# Altium PCB STM32WB_module.PcbDoc
Units mm, origin at the board's own origin, x right, y up, seen from the top; angles counter-clockwise.
Board outline 36.3 x 28.14 mm, 4 copper layers (Top Layer, Mid Layer 1, Mid Layer 2, Bottom Layer), stack 1.57 mm thick; 27 components, 26 nets, 185 pads, 235 vias.
Unrouted connection lines stored in the file: 1.
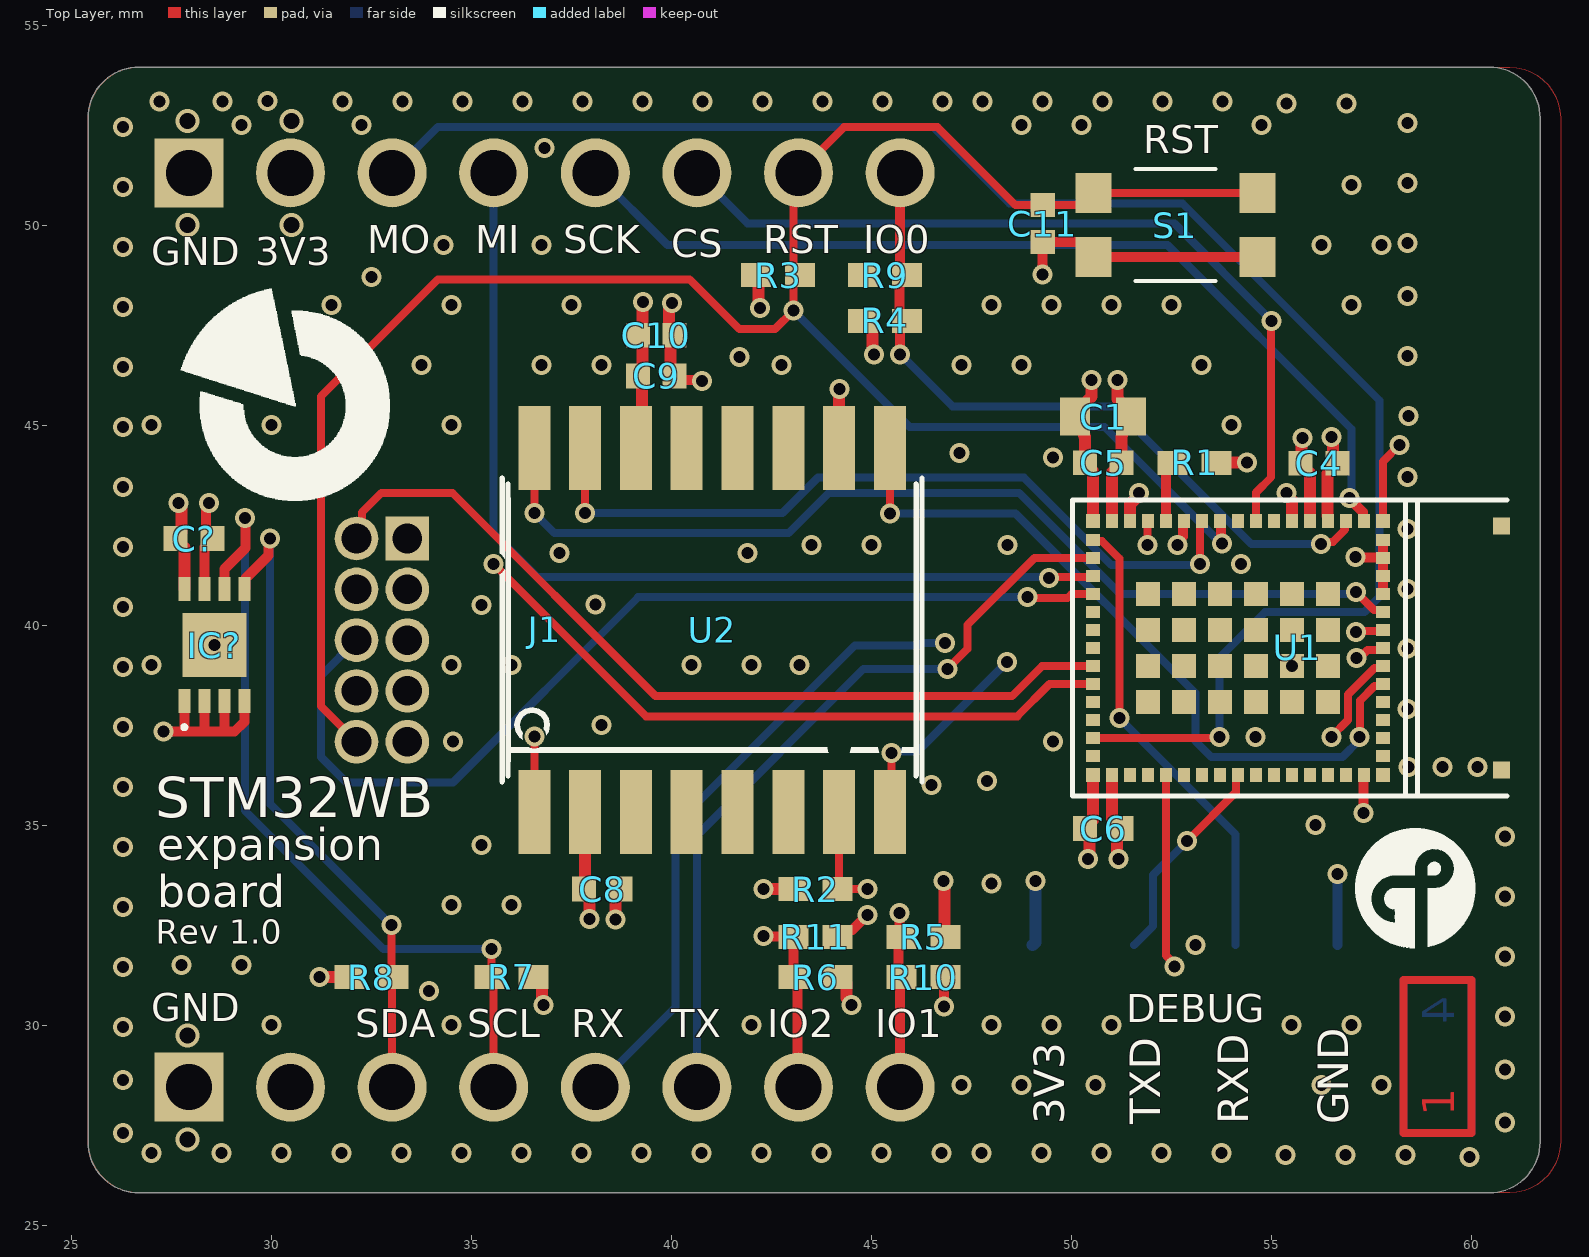
[diagram p0: Top Layer view]
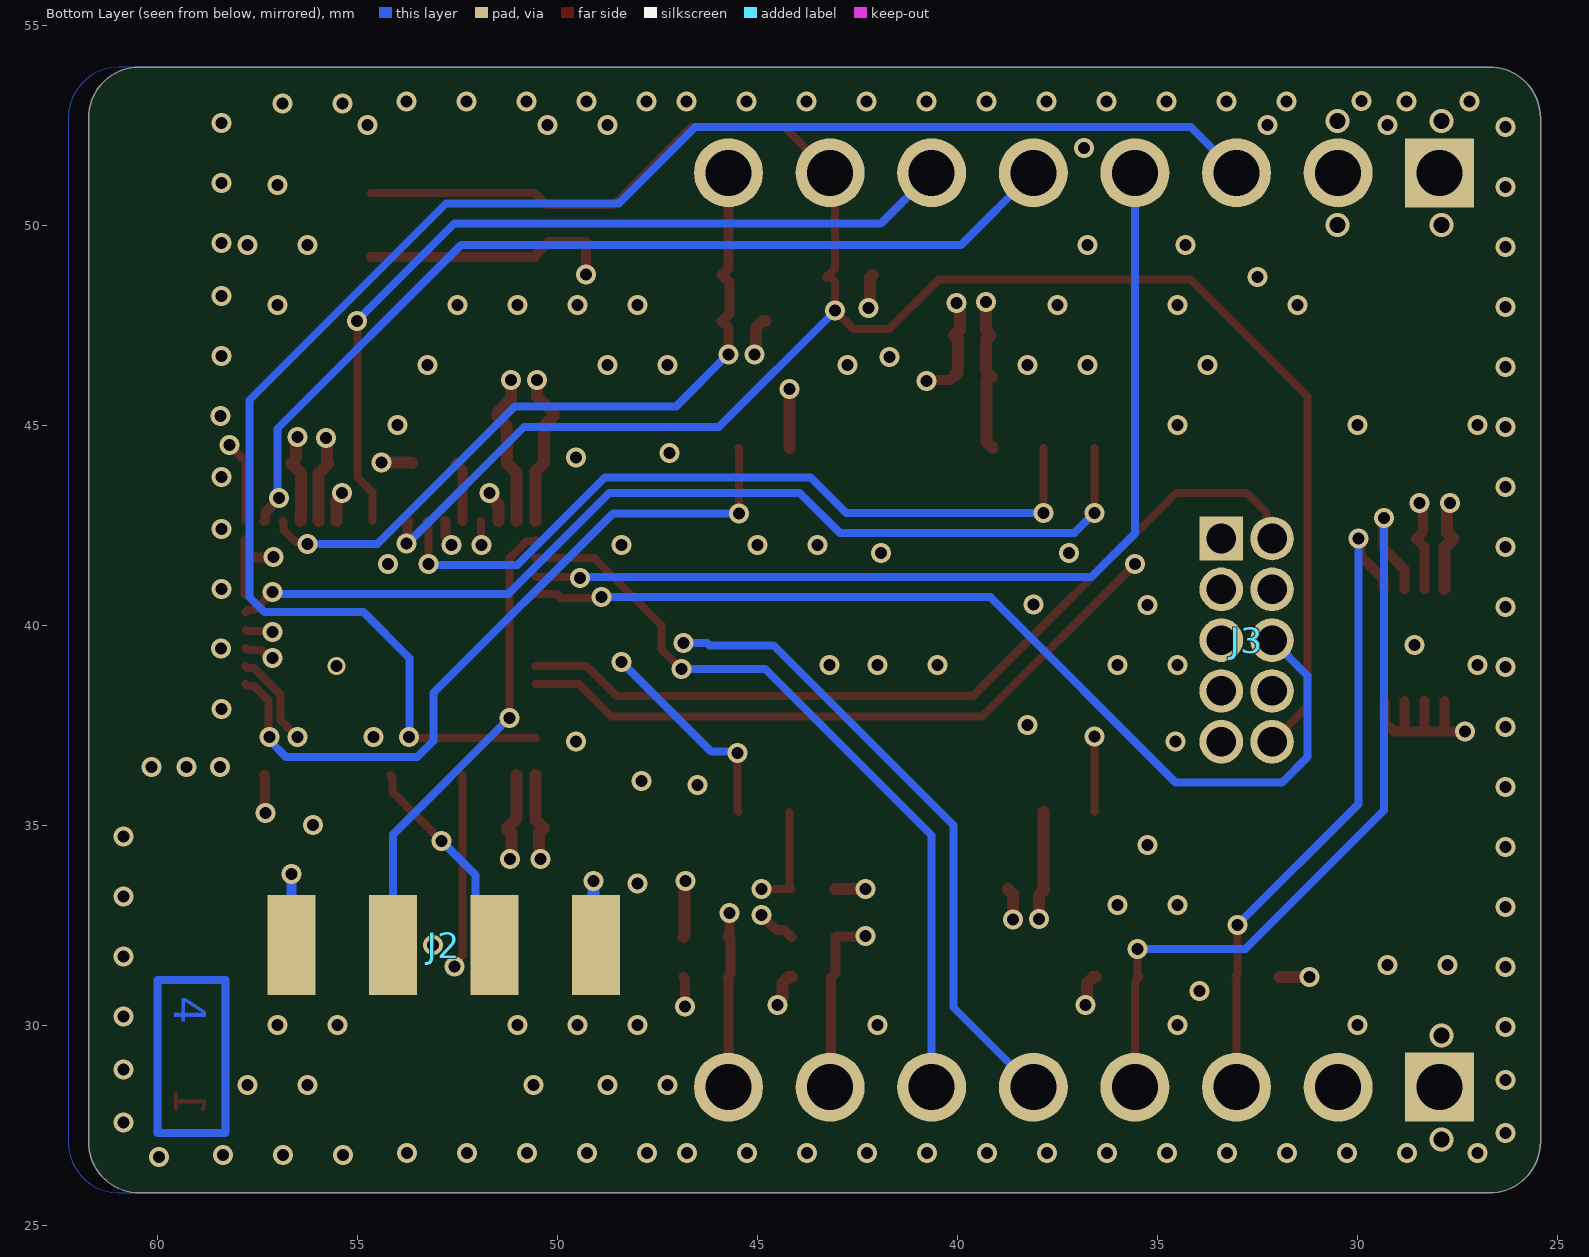
[diagram p1: Bottom Layer view, seen from below]
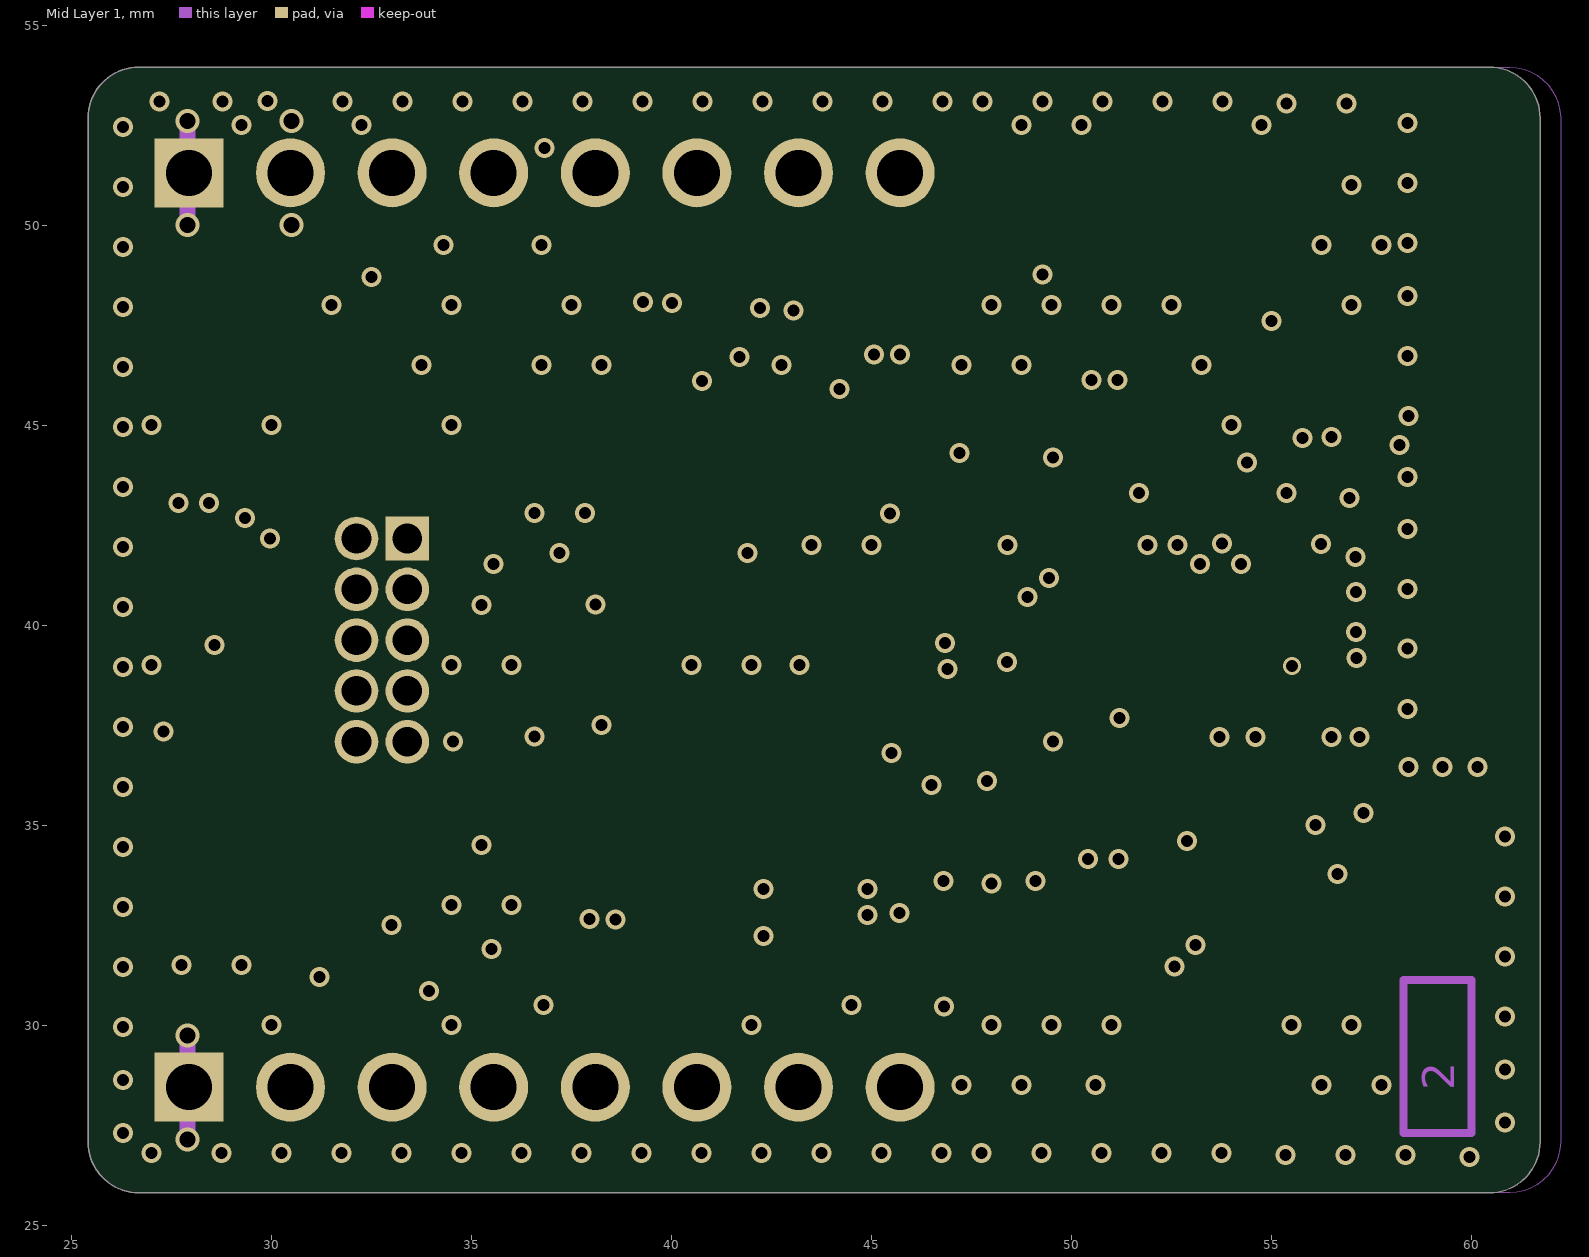
[diagram p2: Mid Layer 1]
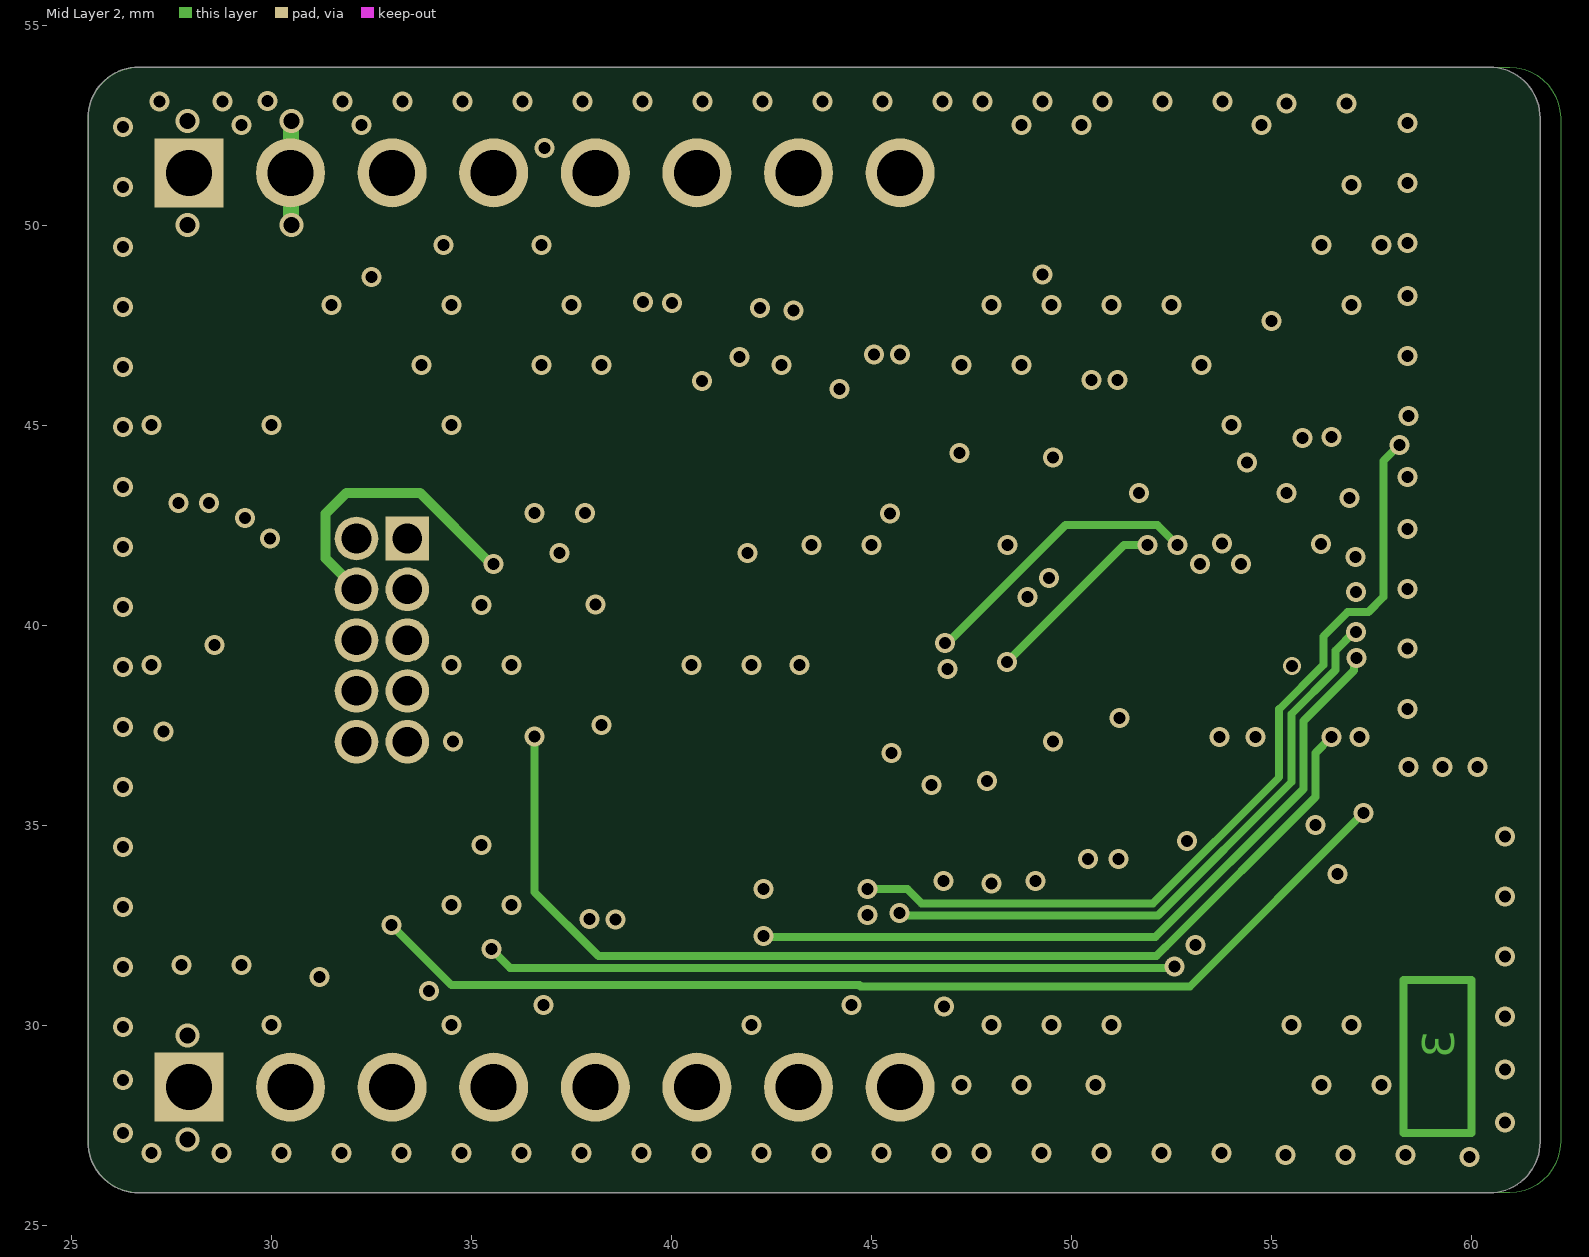
[diagram p3: Mid Layer 2]

## Layer stack, top to bottom
Top Solder: solder mask 0.0127, Solder Resist, Dk 3.8
Top Layer: signal copper 0.035
Dielectric 1: prepreg 0.1, 2313, Dk 4.05
Mid Layer 1: signal copper 0.0175
Core: core 1.265, FR-4, Dk 4.5
Mid Layer 2: signal copper 0.0175
Dielectric 2: prepreg 0.1, 2313, Dk 4.05
Bottom Layer: signal copper 0.035
Bottom Solder: solder mask 0.0127, Solder Resist, Dk 3.8

## Board outline
26.69,25.808 cw(c26.69,27.078) 25.42,27.078 25.42,52.678 cw(c26.69,52.678) 26.69,53.948 60.45,53.948 cw(c60.45,52.678) 61.72,52.678 61.72,27.078 cw(c60.45,27.078) 60.45,25.808

## Design rules (kind name [scope] priority, off if disabled: settings)
BoardOutlineClearance [All] p1: gap=0.6 ignorepadtopadclearanceinfootprint=FALSE
Clearance [All] p1: gap=0.102 ignorepadtopadclearanceinfootprint=FALSE except(0.127: Arc-Via Track-Via SMDPad-Via THPad-Via Via-Via Via-Fill Via-Poly Via-Region Via-Text; 0.25: Arc-Hole Track-Hole SMDPad-Hole THPad-Hole Via-Hole Fill-Hole Poly-Hole Region-Hole Text-Hole)
ComponentClearance [All] p1: gap=0.102 collisioncheckmode=3 verticalgap=0.102 showdistances=TRUE
DiffPairsRouting [All] p1: maxlimit=0.102 minlimit=0.102 mostfreqgap=0.102 toplayer_minwidth=0.102 toplayer_maxwidth=1816.048 toplayer_prefwidth=0.102 midlayer1_minwidth=0.102 midlayer1_maxwidth=1816.048 midlayer1_prefwidth=0.102 midlayer2_minwidth=0.102 midlayer2_maxwidth=1816.048 midlayer2_prefwidth=0.102 bottomlayer_minwidth=0.102 bottomlayer_maxwidth=1816.048 bottomlayer_prefwidth=0.102 maxuncoupledlength=12.7
Height [All] p1: minheight=0 maxheight=1816.048 prefheight=12.7
HoleSize [All] p1: absolutevalues=TRUE maxlimit=6.3 minlimit=0.2 maxpercent=80.000 minpercent=20.000
HoleToHoleClearance [All] p1: gap=0.25 allowstackedmicrovias=FALSE
MinimumAnnularRing [All] p1: minimumring=0.074
MinimumSolderMaskSliver [All] p1: minsoldermaskwidth=0
PlaneClearance [All] p1: clearance=0.102
PlaneConnect [All] p1: pad.planeconnectstyle=Relief pad.reliefexpansion=0.3 pad.reliefentries=4 pad.reliefconductorwidth=0.3 pad.reliefairgap=0.102 via.planeconnectstyle=Direct via.reliefexpansion=0.3 via.reliefentries=4 via.reliefconductorwidth=0.127 via.reliefairgap=0.127
PlaneConnect PlaneConnectPowerPads [InPadClass('PowerPads')] p2: planeconnectstyle=Direct reliefexpansion=0.508 reliefentries=4 reliefconductorwidth=0.254 reliefairgap=0.254
PolygonConnect PolygonConnectPowerPads [All vs (InPadClass('PowerPads'))] p1: connectstyle=Direct reliefconductorwidth=0.254 reliefentries=4 polygonreliefangle="90 Angle" airgapwidth=0.254
PolygonConnect [All] p2: thpad.connectstyle=Relief thpad.reliefconductorwidth=0.25 thpad.reliefentries=4 thpad.polygonreliefangle="90 Angle" thpad.airgapwidth=0.102 smdpad.connectstyle=Relief smdpad.reliefconductorwidth=0.25 smdpad.reliefentries=4 smdpad.polygonreliefangle="90 Angle" smdpad.airgapwidth=0.102 via.connectstyle=Direct via.reliefconductorwidth=0.127 via.reliefentries=4 via.polygonreliefangle="90 Angle" via.airgapwidth=0.127
RoutingVias [All] p1: holewidth=0.2 width=0.45 viastyle="Through Hole" minholewidth=0.2 minwidth=0.45 maxholewidth=6.3 maxwidth=6.55
SilkToSilkClearance [All] p1: silktosilkclearance=0
SilkToSolderMaskClearance [IsPad] p1: minsilkscreentomaskgap=0.102 clearancetoexposedcopper=TRUE
SolderMaskExpansion [All] p1: expansion=0.075 istentingtop=FALSE
SupplyNets "Schematic Supply Nets_2" [InNet('GND')] p1: voltage=0.000
SupplyNets "Schematic Supply Nets_1" [InNet('3V3')] p2: voltage=0.000
Width [All] p1: maxlimit=1816.048 minlimit=0.102 preferedwidth=0.102
20 further rules are at their usual default settings.

## Classes and differential pairs
component class U_EEPROM_ID: C? IC?
component class U_STM32WB: C1 C4 C5 C6 R1 U1
component class U_Flash: C8 C9 C10 R2 U2
component class main: C11 J1 J2 J3 R3 R4 R5 R6 R7 R8 R9 R10 R11 S1

## Components (designator, comment, footprint, x,y, rotation, side; value= is the part's Value field where it differs from the comment)
C1 "4.7uF" CAPC1608X90N 50.797,45.215 r0 top
C4 "100nF" CAPC1005X70N 56.19,44.048 r0 top
C5 "100nF" CAPC1005X70N 50.797,44.058 r180 top
C6 "100nF" CAPC1005X70N 50.797,34.914 r0 top
C8 "100nF" CAPC1005X70N 38.275,33.401 r180 top
C9 "100nF" CAPC1005X70N 39.624,46.228 r180 top
C10 "100p" CAPC1005X70N 39.624,47.244 r180 top
C11 "100nF" CAPC1005X70N 49.284,50.038 r90 top
C? "100nF" CAPC1005X70N 28.067,42.164 r180 top
IC? "M24C02-FMC6TG" M24C02FMC6TG 28.575,39.497 r0 top
J1 "MicroBUS_conn" MicroBUS_header 27.94,28.448 r0 top locked
J2 "310-87-104-41-205101" 310-87-104-41-205101 52.84,26.797 r0 bottom
J3 "SHF-105-01-L-D-RA" SAMTEC_SHF-105-01-L-D-RA 32.766,39.624 r270 bottom
R1 "100k" RESC1005X35N 53.083,44.058 r0 top
R2 "10k" RESC1005X35N 43.6,33.4 r0 top
R3 "DNP" RESC1005X35N 42.672,48.749 r0 top
R4 "DNP" RESC1005X40N 45.339,47.606 r180 top
R5 "DNP" RESC1005X40N 46.3,32.2 r0 top
R6 "DNP" RESC1005X40N 43.6,31.2 r0 top
R7 "DNP" RESC1005X35N 36,31.2 r0 top
R8 "DNP" RESC1005X35N 32.5,31.2 r180 top
R9 "1M" RESC1005X40N 45.339,48.749 r0 top
R10 "1M" RESC1005X40N 46.3,31.2 r180 top
R11 "1M" RESC1005X40N 43.6,32.2 r180 top
S1 "KMR731NG_LFS" KMR731NGLFS 52.604,50 r0 top
U1 "STM32WB5MMGH6TR" MOD_DORY_STM_86P_7P3X11_H1P342_Ref2 55.718,39.428 r270 top locked
U2 "S25FL128SDSMFV001" ICC_SOIC16_10P30X7P50_P127_H2P65 41.021,39.878 r0 top

## Footprints (in the part's own frame and the unit in brackets; to place one, negate y for a bottom-side part, rotate by r counter-clockwise, add the part's x,y. Pads: shape width x height; smd on the part's side, far side on the other; paste and mask are expansions set on the pad)
310-87-104-41-205101 [mm]
  rect 1.2x2.5 smd: 1(-3.81,-5.2) 2(-1.27,-5.2) 3(1.27,-5.2) 4(3.81,-5.2)
  body extent -5.08,-6.25 5.08,0.85, height 2.52
CAPC1005X70N [mm]
  rect 0.6x0.62 smd: 1(-0.46,0) 2(0.46,0)
  body extent -0.5,-0.25 0.5,0.25, height 0.25
CAPC1608X90N [mm]
  rect 0.75x0.94 smd: 1(-0.7,0) 2(0.7,0)
  body extent -0.8,-0.45 0.8,0.45, height 0.8
ICC_SOIC16_10P30X7P50_P127_H2P65 [mm]
  rect 0.8x2.1 smd mask+0.05: 1(-4.445,-4.55) 2(-3.175,-4.55) 3(-1.905,-4.55) 4(-0.635,-4.55) 5(0.635,-4.55) 6(1.905,-4.55) 7(3.175,-4.55) 8(4.445,-4.55) 9(4.445,4.55) 10(3.175,4.55) 11(1.905,4.55) 12(0.635,4.55) 13(-0.635,4.55) 14(-1.905,4.55) 15(-3.175,4.55) 16(-4.445,4.55)
  silkscreen extent -5.31,-3.86 5.25,3.86, body extent -5.25,-5.35 5.25,5.35, height 2.66
KMR731NGLFS [mm]
  rect 0.9x1 smd: 1(-2.05,-0.8) 2(2.05,-0.8) 3(2.05,0.8) 4(-2.05,0.8)
  silkscreen extent -1,-1.4 1,1.4, body extent -2.3,-1.4 2.3,1.4, height 2.5
M24C02FMC6TG [mm]
  rect 0.3x0.6 smd: 1(-0.75,-1.4) 2(-0.25,-1.4) 3(0.25,-1.4) 4(0.75,-1.4) 5(0.75,1.4) 6(0.25,1.4) 7(-0.25,1.4) 8(-0.75,1.4)
  rect 1.6x1.6 smd: 9(0,0)
  silkscreen extent -0.8,-2.1 -0.7,-2, body extent -1,-1.5 1,1.5, height 0.7
MicroBUS_header [mm]
  rect 1.725x1.725 hole 1.15: 1(0,22.86) 9(0,0)
  round 1.725 hole 1.15: 2(2.54,22.86) 3(5.08,22.86) 4(7.62,22.86) 5(10.16,22.86) 6(12.7,22.86) 7(15.24,22.86) 8(17.78,22.86) 10(2.54,0) 11(5.08,0) 12(7.62,0) 13(10.16,0) 14(12.7,0) 15(15.24,0) 16(17.78,0)
  body extent -1.57,-1.27 19.05,24.13, height 2.5
MOD_DORY_STM_86P_7P3X11_H1P342_Ref2 [mm]
  rect 0.35x0.35 smd mask+0.038: 1(-3.175,2.075) 17(-3.175,-5.175) 31(3.175,-5.175) 47(3.175,2.075)
  rect 0.35x0.3 smd mask+0.038: 2(-3.175,1.6) 3(-3.175,1.15) 4(-3.175,0.7) 5(-3.175,0.25) 6(-3.175,-0.2) 7(-3.175,-0.65) 8(-3.175,-1.1) 9(-3.175,-1.55) 10(-3.175,-2) 11(-3.175,-2.45) 12(-3.175,-2.9) 13(-3.175,-3.35) 14(-3.175,-3.8) 15(-3.175,-4.25) 16(-3.175,-4.7) 32(3.175,-4.7) 33(3.175,-4.25) 34(3.175,-3.8) 35(3.175,-3.35) 36(3.175,-2.9) 37(3.175,-2.45) 38(3.175,-2) 39(3.175,-1.55) 40(3.175,-1.1) 41(3.175,-0.65) 42(3.175,-0.2) 43(3.175,0.25) 44(3.175,0.7) 45(3.175,1.15) 46(3.175,1.6)
  rect 0.3x0.35 smd mask+0.038: 18(-2.7,-5.175) 19(-2.25,-5.175) 20(-1.8,-5.175) 21(-1.35,-5.175) 22(-0.9,-5.175) 23(-0.45,-5.175) 24(0,-5.175) 25(0.45,-5.175) 26(0.9,-5.175) 27(1.35,-5.175) 28(1.8,-5.175) 29(2.25,-5.175) 30(2.7,-5.175) 48(2.7,2.075) 49(2.25,2.075) 50(1.8,2.075) 51(1.35,2.075) 52(0.9,2.075) 53(0.45,2.075) 54(0,2.075) 55(-0.45,2.075) 56(-0.9,2.075) 57(-1.35,2.075) 58(-1.8,2.075) 59(-2.25,2.075) 60(-2.7,2.075)
  rect 0.6x0.6 smd mask+0.038: 61(-1.35,0.7) 62(-1.35,-0.2) 63(-1.35,-1.1) 64(-1.35,-2) 65(-1.35,-2.9) 66(-1.35,-3.8) 67(-0.45,-3.8) 68(0.45,-3.8) 69(1.35,-3.8) 70(1.35,-2.9) 71(1.35,-2) 72(1.35,-1.1) 73(1.35,-0.2) 74(1.35,0.7) 75(0.45,0.7) 76(-0.45,0.7) 77(-0.45,-0.2) 78(-0.45,-1.1) 79(-0.45,-2) 80(-0.45,-2.9) 81(0.45,-2.9) 82(0.45,-2) 83(0.45,-1.1) 84(0.45,-0.2)
  rect 0.43x0.43 smd mask+0.05: 85(-3.05,5.035) 86(3.05,5.035)
  silkscreen extent -3.7,-5.69 3.7,5.18, body extent -3.62,-5.62 3.68,5.38, height 1.43
RESC1005X35N [mm]
  rect 0.75x0.6 smd: 1(-0.55,0) 2(0.55,0)
  body extent -0.5,-0.25 0.5,0.25, height 0.35
RESC1005X40N [mm]
  rect 0.75x0.6 smd: 1(-0.55,0) 2(0.55,0)
  body extent -0.5,-0.25 0.5,0.25, height 0.4
SAMTEC_SHF-105-01-L-D-RA [mm]
  rect 1.09x1.09 hole 0.74: 01(-2.54,-0.635)
  round 1.09 hole 0.74: 02(-2.54,0.635) 03(-1.27,-0.635) 04(-1.27,0.635) 05(0,-0.635) 06(0,0.635) 07(1.27,-0.635) 08(1.27,0.635) 09(2.54,-0.635) 10(2.54,0.635)
  body extent -6.35,-0.84 6.35,7.23, height 1.71

## Part data
C1: library part GRM188R61E475KE11J, "Capacitor", Manufacturer_Name="Murata Electronics", Mouser Part Number=81-GRM188R61E475KE1J, Arrow Part Number=GRM188R61E475KE11J, Arrow Price/Stock=https://www.arrow.com/en/products/grm188r61e475ke11j/murata-manufacturing, Datasheet Link=https://search.murata.co.jp/Ceramy/image/img/A01X/G101/ENG/GRM188R61E475KE11-01A.pdf, Height=0.9mm, Manufacturer_Part_Number=GRM188R61E475KE11J, Mouser Price/Stock=https://www.mouser.co.uk/ProductDetail/Murata-Electronics/GRM188R61E475KE11J?qs=hNud%2FORuBR3%2Fa9GLJFT8KA%3D%3D
C4 C5 C6 C8 C9 C11 C?: library part GRM155R61A104KA01D, "Capacitor", Manufacturer_Name="Murata Electronics", Mouser Part Number=81-GRM155R61A104KA01, Arrow Part Number=GRM155R61A104KA01D, Arrow Price/Stock=https://www.arrow.com/en/products/grm155r61a104ka01d/murata-manufacturing?utm_currency=USD&region=europe, Datasheet Link=https://search.murata.co.jp/Ceramy/image/img/A01X/G101/ENG/GRM155R61A104KA01-02A.pdf, Height=0.7mm, Manufacturer_Part_Number=GRM155R61A104KA01D, Mouser Price/Stock=https://www.mouser.co.uk/ProductDetail/Murata-Electronics/GRM155R61A104KA01D?qs=5bAuhL3RhmNZw0v59AqOJA%3D%3D
C10: library part GRM1555C1E101JA01D, "Capacitor", Manufacturer_Name="Murata Electronics", Mouser Part Number=81-GRM1555C1E101JA1D, Arrow Part Number=GRM1555C1E101JA01D, Arrow Price/Stock=https://www.arrow.com/en/products/grm1555c1e101ja01d/murata-manufacturing, Datasheet Link=https://search.murata.co.jp/Ceramy/image/img/A01X/G101/ENG/GRM1555C1E101JA01-01A.pdf, Height=0.7mm, Manufacturer_Part_Number=GRM1555C1E101JA01D, Mouser Price/Stock=https://www.mouser.co.uk/ProductDetail/Murata-Electronics/GRM1555C1E101JA01D?qs=wzfj1GSNDILQV4cKnk3IaA%3D%3D
IC?: "Integrated Circuit", Manufacturer_Name=STMicroelectronics, Mouser Part Number=511-M24C02-FMC6TG, Arrow Part Number=M24C02-FMC6TG, Arrow Price/Stock=https://www.arrow.com/en/products/m24c02-fmc6tg/stmicroelectronics?region=nac, Datasheet Link=https://www.st.com/resource/en/datasheet/m24c01-r.pdf, Height=0.6mm, Manufacturer_Part_Number=M24C02-FMC6TG, Mouser Price/Stock=https://www.mouser.co.uk/ProductDetail/STMicroelectronics/M24C02-FMC6TG?qs=WHlX%252B%252B9%2FRwB%252BxJ8bQxWbzQ%3D%3D
J1: "Connector", Manufacturer_Name=Harwin, Manufacturer_Part_Number=M20-9730845, Mouser Part Number=855-M20-9730845, Datasheet Link=https://cdn.harwin.com/pdfs/M20-973.pdf, Height=9.54mm, Mouser Price/Stock=https://www.mouser.co.uk/ProductDetail/Harwin/M20-9730845?qs=%252Bk6%2F5FB6qrnRfgIEPS4Dkw%3D%3D
J3: Package=None, Availability=Unavailable, MF=Samtec, MP=SHF-105-01-L-D-RA, Price=None
R1 R3: library part RT0402FRE07100KL, "Resistor", Manufacturer_Name=KEMET, Mouser Part Number=603-RT0402FRE07100KL, Arrow Part Number=RT0402FRE07100KL, Arrow Price/Stock=https://www.arrow.com/en/products/rt0402fre07100kl/yageo, Datasheet Link=https://www.yageo.com/upload/media/product/productsearch/datasheet/rchip/PYu-RT_1-to-0.01_RoHS_L_11.pdf, Height=0.35mm, Manufacturer_Part_Number=RT0402FRE07100KL, Mouser Price/Stock=https://www.mouser.co.uk/ProductDetail/YAGEO/RT0402FRE07100KL?qs=BXCcY9r%252B08CxTvf5JB1kiw%3D%3D
R2: library part RT0402FRE0710KL, "Resistor", Arrow Part Number=RT0402FRE07100KL, Manufacturer_Name=KEMET, Mouser Part Number=603-RT0402FRE0710KL, Arrow Price/Stock=https://www.arrow.com/en/products/rt0402fre07100kl/yageo, Datasheet Link=https://cz.mouser.com/datasheet/2/447/PYu_RT_1_to_0_01_RoHS_L_15-3461507.pdf, Height=0.35mm, Manufacturer_Part_Number=RT0402FRE0710KL, Mouser Price/Stock=https://www.mouser.co.uk/ProductDetail/YAGEO/RT0402FRE07100KL?qs=BXCcY9r%252B08CxTvf5JB1kiw%3D%3D
R4 R5 R6 R9 R10 R11: library part RC0402FR-071ML, "Resistor", Manufacturer_Name=YAGEO, Mouser Part Number=603-RC0402FR-071ML, Arrow Part Number=RC0402FR-071ML, Arrow Price/Stock=https://www.arrow.com/en/products/rc0402fr-071ml/yageo?region=nac, Datasheet Link=https://componentsearchengine.com/Datasheets/2/RC0402FR-071ML.pdf, Height=0.4mm, Manufacturer_Part_Number=RC0402FR-071ML, Mouser Price/Stock=https://www.mouser.co.uk/ProductDetail/YAGEO/RC0402FR-071ML?qs=V1yeUXFNrknfoI4987wfBQ%3D%3D
R7 R8: library part RT0402FRE075K1L, "Resistor", Manufacturer_Name=YAGEO, Datasheet Link=https://www.yageo.com/upload/media/product/app/datasheet/rchip/pyu-rt_1-to-0.01_rohs_l.pdf, Height=0.35mm, Manufacturer_Part_Number=RT0402FRE075K1L, Mouser Part Number=RT0402FRE075K1L, Mouser Price/Stock=https://www.mouser.co.uk/ProductDetail/YAGEO/RT0402FRE07100RL?qs=BXCcY9r%252B08AcvLZjF7vcwQ%3D%3D
S1: "Switch", Arrow Part Number="KMR731NG LFS", Manufacturer_Name="C & K COMPONENTS", Mouser Part Number=611-KMR731NGLFS, Arrow Price/Stock=https://www.arrow.com/en/products/kmr731nglfs/ck, Datasheet Link=https://www.ckswitches.com/media/1908/kmr7.pdf, Manufacturer_Part_Number="KMR731NG LFS", Mouser Price/Stock=https://www.mouser.com/Search/Refine.aspx?Keyword=611-KMR731NGLFS
U1: "MCU module, LGA-86, Cortex-M4, 64 MHz, 1 MB Flash, 256 kB RAM, BLE 5.4, 802.15.4", Case/Package=LGA-86, Manufacturer=STMicroelectronics, Max Operating Temperature=85°C, Min Operating Temperature=-40°C, Supplier Part Number=511-STM32WB5MMGH6TR, Category=MCUs, Datasheet=https://www.st.com/resource/en/datasheet/stm32wb5mmg.pdf, Manufacturer Part Number=STM32WB5MMGH6TR, Part Name=STM32WB5MMGH6TR, Supplier=Mouser
U2: "Quad SPI with SOIC package 16-pins", Alternate_Manufacturer=N/A, Manufacturer=CYPRESS, Package="SOIC 16-pins", Alternate_Manufacturer_Part_Number=N/A, ComponentLink1URL=http://tunmcdsvn.tun.st.com/Component_Datasheet_Library/Trunk/IC/Cypress_128_Mbit_3V_S25FL128SDSMFV001, Internal_Part_Number=MCD-02038, Manufacturer_Part_Number=S25FL128SDSMFV001, Order_Code_Digikey=S25FL128SDSMFV001-ND, Order_Code_Farnell=N/A, Order_Code_RS=N/A, Part_Preference=Recommended, Part_Type=IC, Status=Released

## Via types
v1: diameter 0.5, hole 0.3, Top Layer to Bottom Layer, tented both sides, 228 vias
v2: diameter 0.6, hole 0.4, Top Layer to Bottom Layer, tented both sides, 6 vias
v3: diameter 0.45, hole 0.3, Top Layer to Bottom Layer, tented both sides, 1 vias

## Nets (pads, with @x,y where several pads share a name; then routed paths per layer and width w, separated by ;. In a path a pad name is that pad's centre, name@x,y a point inside that pad or via, vN(x,y) a via of type N, cw(c..) or ccw(c..) an arc to the next point about the centre after c; other vN are vias at no path point)
3V3: C1.1 C4.2 C5.2 C6.2 C8.2 C9.2 C10.2 C?.2 IC?.8 J1.2 J2.1 J3.01 R2.1 R3.1 R4.2 R5.2 R6.2 R7.2 R8.2 U1.4 U1.6 U1.15 U1.17 U1.32 U2.2 U2.14 | length 29.8
  Top Layer w0.3: v1(27.686,43.053) 27.686,42.999 27.754,42.931 27.754,42.311 C?.2 27.607,42.154 27.825,41.936 IC?.8 ; v1(31.2,31.2) R8.2 ; R7.2 36.601,31.2 36.751,31.05 36.762,31.05 36.762,30.535 v1(36.8,30.497) ; U2.2 37.846,33.432 C8.2 37.958,33.258 v1(37.958,32.654) ; U2.14 39.273,44.585 39.273,46.119 C9.2 ; C9.2@39.14,46.204 C9.2 ; v1@39.28,48.073 39.28,47.36 C10.2 39.286,47.122 39.286,46.35 C9.2 ; R3.1 42.179,48.692 42.179,47.963 v1(42.217,47.925) ; v1(42.3,33.4) R2.1 ; R6.2 44.225,31.2 44.375,31.05 44.375,30.676 44.5,30.551 v1(44.5,30.497) ; R4.2 44.864,47.606 45.014,47.456 45.014,47.381 45.032,47.363 45.032,46.806 v1(45.07,46.768) ; v1(46.8,33.6) 46.825,33.575 46.825,32.225 R5.2 ; v1(50.504,46.123) 50.504,45.711 50.328,45.535 50.322,45.535 50.097,45.31 C1.1 50.322,44.99 50.322,44.734 50.337,44.719 C5.2 50.337,44.048 50.543,43.842 U1.17 ; U1.32 51.018,35.163 51.257,34.924 C6.2 51.142,34.799 51.142,34.188 v1(51.178,34.152) ; U1.15 51.468,43.024 51.697,43.253 v1(51.697,43.307) ; v1(55.38,43.307) 55.38,43.253 55.518,43.115 U1.6 ; U1.4 56.418,42.716 56.405,42.729 56.405,43.793 56.65,44.038 C4.2 56.538,44.159 56.538,44.662 v1(56.5,44.7)
  Mid Layer 2 w0.4: v2(30.5,50) 30.49,50.01 30.49,51.298 J1.2 30.49,51.318 30.49,52.59 v2(30.5,52.6)
  Bottom Layer w0.3: J2.1 49.1,32.067 v1(49.1,33.6)
  other v1: 39.288,48.081
CLK: U1.56 U2.16 | length 24.7
  Top Layer w0.2: v1(36.576,42.799) U2.16 ; v1(57.118,40.826) 57.566,40.378 57.743,40.378 U1.56
  Bottom Layer w0.2: v1(36.576,42.799) 37.076,42.299 42.934,42.299 43.942,43.307 48.693,43.307 51.218,40.782 57.074,40.782 v1(57.118,40.826)
CS: R2.2 U1.1 U2.7 | length 26.3
  Top Layer w0.2: R2.2 44.196,33.446 U2.7 ; R2.2@44.238,33.401 44.239,33.4 v1(44.9,33.4) ; U1.1 57.793,44.093 v1(58.2,44.5)
  Mid Layer 2 w0.2: v1(44.9,33.4) 45.9,33.4 46.256,33.044 52.044,33.044 55.198,36.198 55.198,37.898 56.3,39 56.3,39.715 56.911,40.326 57.426,40.326 57.8,40.7 57.8,44.1 v1(58.2,44.5)
GND: C1.2 C4.1 C5.1 C6.1 C8.1 C9.1 C10.1 C11.1 C?.1 IC?.1 IC?.2 IC?.3 IC?.4 IC?.7 IC?.9 J1.1 J1.9 J2.4 J3.03 J3.05 J3.09 R1.2 R9.1 R10.1 R11.1 S1.1 S1.2 U1.5 U1.16 U1.31 U1.57 U1.58 U1.59 U1.60 U1.84 U1.86 U2.10 | length 82.8
  Top Layer w0.2: 58.3,27.3 58.3,31.129 60,31.129 60,27.3 58.3,27.3
  Top Layer w0.25: v1(27.305,37.338) 27.813,37.338 ; IC?.1 27.825,37.35 27.813,37.338 ; IC?.2 28.325,37.342 28.321,37.338 ; IC?.7 28.325,41.952 28.527,42.154 C?.1 28.361,42.33 28.361,42.899 28.448,42.985 v1(28.448,43.053) ; IC?.3 28.825,37.469 28.829,37.465 28.829,37.338 ; IC?.4 29.325,37.58 29.083,37.338 28.829,37.338 ; C9.1 40.189,46.123 40.745,46.123 v1(40.767,46.101) ; R11.1 44.325,32.375 44.525,32.375 v1(44.9,32.75) ; v1(46.812,30.461) 46.812,31.162 R10.1 ; v1(49.284,48.768) C11.1 50.226,49.578 50.554,49.25 S1.1 S1.2 ; v1(57.1,41.7) 57.111,41.689 U1.59@57.782,41.689 ; U1.57 U1.58 U1.59 U1.59@57.782,41.689 ; U1.60 57.793,41.7 U1.59@57.782,41.689 ; 27.813,37.338 28.321,37.338 ; 28.321,37.338 28.829,37.338
  Top Layer w0.3: v1(38.608,32.639) 38.608,33.274 C8.1 ; v1(40.014,48.047) 40.014,47.993 39.937,47.916 39.937,47.391 C10.1 39.983,47.143 39.983,46.329 C9.1 ; U2.10 44.198,44.43 44.198,45.898 v1(44.2,45.9) ; v1(50.416,34.152) 50.452,34.188 50.452,34.799 C6.1 50.337,34.924 50.543,35.13 U1.31 ; U1.16 51.018,43.809 51.257,44.048 C5.1 51.257,44.719 51.272,44.734 51.272,44.99 C1.2 51.497,45.31 51.154,45.654 v1(51.154,46.123) ; R1.2 53.636,44.061 54.394,44.061 v1(54.396,44.064) ; v1(55.779,44.676) 55.754,44.652 55.754,44.073 C4.1 55.73,44.038 55.968,43.8 U1.5
  Mid Layer 1 w0.2: 58.3,27.3 58.3,31.129 60,31.129 60,27.3 58.3,27.3
  Mid Layer 1 w0.4: v2(27.9,27.14) 27.9,28.408 J1.9 27.9,28.488 v2(27.9,29.74) ; v2(27.9,50) 27.9,51.268 J1.1 27.9,51.348 v2(27.9,52.6)
  Mid Layer 2 w0.2: 58.3,27.3 60,27.3 60,31.129 58.3,31.129 58.3,27.3
  Bottom Layer w0.2: 58.3,27.3 60,27.3 60,31.129 58.3,31.129 58.3,27.3
  Bottom Layer w0.25: J2.4 v1(56.65,33.782)
  other v1: 59.957,26.697 55.357,26.747 56.857,26.747 58.357,26.747 27,26.8 28.757,26.797 30.257,26.797 31.757,26.797 33.257,26.797 34.757,26.797 36.257,26.797 37.757,26.797 39.257,26.797 40.757,26.797 42.257,26.797 43.757,26.797 45.257,26.797 46.757,26.797 47.757,26.797 49.257,26.797 50.757,26.797 52.257,26.797 53.757,26.797 26.289,27.301 60.841,27.559 47.25,28.5 48.75,28.5 50.6,28.5 56.25,28.5 57.75,28.5 26.289,28.626 60.841,28.884 26.289,29.951 30,30 34.5,30 42,30 48,30 49.5,30 51,30 55.5,30 57,30 60.841,30.209 33.946,30.846 26.289,31.451 27.75,31.5 29.25,31.5 60.841,31.709 53.104,31.996 26.289,32.951 34.5,33 36,33 60.841,33.209 48,33.544 26.289,34.451 35.25,34.5 60.841,34.709 56.104,34.996 26.289,35.951 46.5,36 47.893,36.107 58.428,36.45 59.275,36.45 60.15,36.45 34.544,37.084 49.538,37.084 54.6,37.2 26.289,37.451 38.25,37.5 58.399,37.902 26.289,38.951 27,39 34.5,39 36,39 40.5,39 42,39 43.2,39 58.409,39.412 28.575,39.497 26.289,40.451 35.25,40.5 38.1,40.513 58.399,40.902 54.237,41.529 37.211,41.796 41.91,41.796 26.289,41.951 43.5,42 45,42 48.4,42 58.399,42.402 26.289,43.451 58.4,43.7 49.538,44.196 47.2,44.3 26.289,44.951 27,45 30,45 34.5,45 54,45 58.426,45.227 26.289,46.451 33.75,46.5 36.75,46.5 38.25,46.5 42.75,46.5 47.25,46.5 48.75,46.5 53.25,46.5 41.7,46.7 58.399,46.727 26.289,47.951 31.5,48 34.5,48 37.5,48 48,48 49.5,48 51,48 52.5,48 57,48 58.399,48.227 32.5,48.7 26.289,49.451 34.3,49.5 36.75,49.5 56.25,49.5 57.75,49.5 58.399,49.552 26.289,50.951 57,51 58.399,51.052 36.83,51.926 26.289,52.451 29.25,52.5 32.25,52.5 48.75,52.5 50.25,52.5 54.75,52.5 58.399,52.552 55.374,53.036 56.874,53.036 27.2,53.086 28.774,53.086 29.9,53.098 31.774,53.086 33.274,53.086 34.774,53.086 36.274,53.086 37.774,53.086 39.274,53.086 40.774,53.086 42.274,53.086 43.774,53.086 45.274,53.086 46.774,53.086 47.774,53.086 49.274,53.086 50.774,53.086 52.274,53.086 53.774,53.086
  other v3: 55.516,38.976
GPIO0: J1.8 R4.1 R9.2 U1.3 | length 18.3
  Top Layer w0.2: v1(56.243,42.029) 56.291,42.077 56.537,42.077 56.795,42.334 56.795,42.337 56.843,42.385 56.843,42.578 U1.3
  Top Layer w0.25: v1(45.72,46.759) 45.72,47.437 R4.1 45.875,47.606 45.7,47.781 45.7,48.574 45.875,48.749 R9.2 45.72,48.918 J1.8
  Bottom Layer w0.2: v1@45.731,46.769 47.034,45.466 51.062,45.466 54.5,42.028 v1@56.242,42.028
GPIO1: J1.16 R5.1 R10.2 U1.55 | length 20.8
  Top Layer w0.2: v1(57.118,39.826) 57.145,39.853 57.768,39.853 U1.55
  Top Layer w0.25: v1(45.7,32.8) 45.7,32.25 R5.1@45.741,32.209 ; J1.16 R10.2@45.72,31.2 ; R10.2 45.674,31.276 45.674,32.143 R5.1@45.741,32.209 ; R5.1 R5.1@45.741,32.209
  Mid Layer 2 w0.2: v1(45.7,32.8) 45.757,32.743 52.169,32.743 55.5,36.073 55.5,37.773 56.602,38.875 56.602,39.361 57.067,39.826 v1(57.118,39.826)
GPIO2: J1.15 R6.1 R11.2 U1.54 | length 24.1
  Top Layer w0.2: v1(57.124,39.176) 57.205,39.176 57.407,39.378 57.743,39.378 U1.54
  Top Layer w0.25: v1(42.3,32.229) 42.314,32.214 43.036,32.214 R11.2 43.05,32.1 R6.1@43.05,31.3 ; R6.1@43.159,31.2 43.159,28.469 J1.15
  Mid Layer 2 w0.2: v1(42.3,32.229) 42.329,32.2 52.1,32.2 55.802,35.902 55.802,37.602 57.066,38.866 57.066,39.119 v1(57.124,39.176)
I2C3_SCL: IC?.6 J1.12 R7.1 U1.35 | length 42.6
  Top Layer w0.2: v1(35.5,31.9) 35.5,31.25 R7.1 35.56,31.09 J1.12 ; U1.35 52.368,31.738 52.571,31.535 v1@52.571,31.475
  Top Layer w0.25: IC?.6 28.825,41.398 29.349,41.922 29.349,42.66 v1(29.337,42.672)
  Mid Layer 2 w0.2: v1(35.5,31.9) 35.973,31.427 52.531,31.427 v1(52.575,31.471)
  Bottom Layer w0.2: v1(29.337,42.672) 29.337,35.363 32.8,31.9 v1(35.5,31.9)
I2C3_SDA: IC?.5 J1.11 R8.1 U1.46 | length 44.2
  Top Layer w0.2: v1(33,32.5) 33,31.25 R8.1 33.02,31.17 J1.11
  Top Layer w0.25: IC?.5 29.35,40.922 29.35,41.161 29.924,41.735 29.924,42.116 v1(29.972,42.164) ; v1(57.3,35.3) 57.309,35.309 57.309,36.244 U1.46
  Mid Layer 2 w0.2: v1(33,32.5) 34.503,30.997 44.707,30.997 44.733,30.971 52.971,30.971 v1(57.3,35.3)
  Bottom Layer w0.2: v1(29.972,42.164) 29.972,35.528 v1(33,32.5)
IO0: U1.11 U2.15 | length 19.4
  Top Layer w0.2: v1(37.846,42.799) U2.15 ; v1(53.221,41.529) 53.221,42.556 U1.11
  Bottom Layer w0.2: v1(37.846,42.799) 42.776,42.799 43.665,43.688 48.812,43.688 51,41.5 53.192,41.5 v1(53.221,41.529)
IO1: U1.14 U2.8 | length 10.7
  Top Layer w0.2: U2.8 45.5,35.362 v1(45.5,36.8) ; v1(51.9,42) 51.909,42.009 51.909,42.594 U1.14
  Mid Layer 2 w0.2: v1(48.395,39.077) 51.317,42 v1(51.9,42)
  Bottom Layer w0.2: v1(45.5,36.8) 45.539,36.839 46.156,36.839 v1(48.395,39.077)
IO2: U1.52 U2.9 | length 18.5
  Top Layer w0.2: v1(45.463,42.792) 45.463,44.425 U2.9 ; v1(57.2,37.2) 57.221,37.221 57.221,38.116 57.583,38.478 57.743,38.478 U1.52
  Bottom Layer w0.2: v1(45.463,42.792) 48.608,42.792 53.1,38.3 53.1,37.1 53.5,36.7 56.781,36.7 57.2,37.119 v1(57.2,37.2)
IO3: U1.53 U2.1 | length 31.7
  Top Layer w0.2: U2.1 v1(36.576,37.211) ; v1(56.5,37.2) 56.5,37.207 56.92,37.627 56.92,38.241 56.92,38.265 57.583,38.928 57.743,38.928 U1.53
  Mid Layer 2 w0.2: v1(36.576,37.211) 36.576,33.329 38.176,31.729 52.125,31.729 52.368,31.971 52.371,31.971 56.103,35.703 56.103,36.803 v1(56.5,37.2)
LPUART1_RX: J1.13 U1.12 | length 23.9
  Top Layer w0.25: v1(52.65,42) 52.65,42.068 52.793,42.211 52.793,42.578 U1.12
  Mid Layer 2 w0.2: v1(46.847,39.554) 46.907,39.554 49.853,42.5 52.15,42.5 v1(52.65,42)
  Bottom Layer w0.2: J1.13 40.1,30.448 40.1,35 44.595,39.495 46.197,39.495 46.255,39.554 v1(46.847,39.554)
LPUART1_TX: J1.14 U1.19 | length 19.4
  Top Layer w0.2: v1(46.9,38.9) 47.4,39.4 47.4,40 49.078,41.678 U1.19
  Bottom Layer w0.2: J1.14 40.64,34.74 44.8,38.9 v1(46.9,38.9)
NetR1_1: R1.1 U1.13 | length 1.5
  Top Layer w0.25: U1.13 52.368,43.893 R1.1
NRST: C11.2 J1.7 J3.10 R3.2 S1.3 S1.4 U1.10 | length 53.1
  Top Layer w0.2: J3.10 31.242,37.973 31.242,45.72 34.163,48.641 40.459,48.641 41.7,47.4 42.593,47.4 v1(43.053,47.86) 43.053,48.58 R3.2 ; R3.2@43.285,48.686 R3.2 ; S1.3 S1.4 50.252,50.498 48.602,50.498 46.649,52.451 44.323,52.451 J1.7 43.055,51.183 43.055,48.916 R3.2
  Top Layer w0.25: U1.10 53.743,42.578 53.743,42.062 v1(53.768,42.037)
  Bottom Layer w0.2: v1(43.053,47.86) 45.955,44.958 50.824,44.958 53.745,42.037 v1(53.768,42.037)
SPI1_CS: J1.6 U1.8 | length 21.1
  Top Layer w0.2: U1.8 54.618,43.318 54.996,43.696 54.996,47.596 v1(55.007,47.607)
  Bottom Layer w0.2: J1.6 41.91,50.038 52.576,50.038 v1(55.007,47.607)
SPI1_MISO: J1.4 U1.20 | length 24.5
  Top Layer w0.2: v1(49.438,41.178) 49.463,41.203 50.518,41.203 U1.20
  Bottom Layer w0.2: J1.4 35.56,42.291 36.651,41.2 49.416,41.2 v1(49.438,41.178)
SPI1_MOSI: J1.3 U1.29 | length 42.7
  Top Layer w0.2: U1.29 53.678,37.178 v1(53.704,37.204)
  Bottom Layer w0.2: J1.3 34.163,52.451 46.549,52.451 48.454,50.546 52.775,50.546 57.7,45.621 57.7,40.7 57.326,40.326 54.848,40.326 53.7,39.178 53.7,37.207 v1(53.704,37.204)
SPI1_SCK: J1.5 U1.2 | length 24
  Top Layer w0.25: v1(56.955,43.178) 56.955,43.161 57.293,42.823 57.293,42.628 U1.2
  Bottom Layer w0.2: J1.5 39.908,49.5 52.407,49.5 57,44.907 57,43.223 v1(56.955,43.178)
SWCLK: J3.04 U1.26 | length 24.3
  Top Layer w0.2: v1(35.56,41.529) 39.37,37.719 48.649,37.719 49.458,38.528 U1.26
  Mid Layer 2 w0.25: J3.04 31.359,41.666 31.359,42.789 31.877,43.307 33.714,43.307 35.492,41.529 v1(35.56,41.529)
SWDIO: J3.02 U1.25 | length 21.6
  Top Layer w0.2: J3.02 32.27,42.303 32.27,42.82 32.756,43.307 34.524,43.307 39.604,38.227 48.522,38.227 49.273,38.978 U1.25
SWO: J3.06 U1.21 | length 24.8
  Top Layer w0.2: v1(48.9,40.7) 48.922,40.678 49.909,40.678 50.009,40.778 U1.21
  Bottom Layer w0.2: J3.06 31.242,38.735 31.242,36.703 31.877,36.068 34.544,36.068 39.172,40.696 48.896,40.696 v1(48.9,40.7)
UART1_RX: J2.3 U1.18 | length 11.7
  Top Layer w0.2: U1.18 50.568,42.103 50.763,42.103 51.2,41.666 v1(51.2,37.678)
  Bottom Layer w0.2: v1(51.2,37.678) 54.11,34.768 J2.3
UART1_TX: J2.2 U1.39 | length 5.3
  Top Layer w0.2: v1(52.896,34.604) 54.118,35.825 54.118,36.203 U1.39
  Bottom Layer w0.2: J2.2 52.045,32.472 52.045,33.752 v1(52.896,34.604)
pads on no net: J1.10 J3.07 J3.08 U1.7 U1.9 U1.22 U1.23 U1.24 U1.27 U1.28 U1.30 U1.33 U1.34 U1.36 U1.37 U1.38 U1.40 U1.41 U1.42 U1.43 U1.44 U1.45 U1.47 U1.48 U1.49 U1.50 U1.51 U1.61 U1.62 U1.63 U1.64 U1.65 U1.66 U1.67 U1.68 U1.69 U1.70 U1.71 U1.72 U1.73 U1.74 U1.75 U1.76 U1.77 U1.78 U1.79 U1.80 U1.81 U1.82 U1.83 U1.85 U2.3 U2.4 U2.5 U2.6 U2.11 U2.12 U2.13

## Polygon pours and split planes (outlines as drawn)
GND on Top Layer "NONET_L01_P-001" (solid, remove dead copper, shelved, pour order 0): 26.69,25.808 cw(c26.69,27.078) 25.42,27.078 25.42,52.678 cw(c26.69,52.678) 26.69,53.948 60.96,53.948 cw(c60.96,52.678) 62.23,52.678 62.23,27.078 cw(c60.96,27.078) 60.96,25.808
3V3 on Mid Layer 2 "NONET_L01_P-001" (solid, remove dead copper, shelved, pour order 1): 26.69,25.808 cw(c26.69,27.078) 25.42,27.078 25.42,52.678 cw(c26.69,52.678) 26.69,53.948 60.96,53.948 cw(c60.96,52.678) 62.23,52.678 62.23,27.078 cw(c60.96,27.078) 60.96,25.808
GND on Bottom Layer "NONET_L01_P-001" (solid, remove dead copper, shelved, pour order 2): 26.69,25.808 cw(c26.69,27.078) 25.42,27.078 25.42,52.678 cw(c26.69,52.678) 26.69,53.948 60.96,53.948 cw(c60.96,52.678) 62.23,52.678 62.23,27.078 cw(c60.96,27.078) 60.96,25.808
GND on Mid Layer 1 "NONET_L01_P-001" (solid, remove dead copper, shelved, pour order 3): 26.69,25.808 cw(c26.69,27.078) 25.42,27.078 25.42,52.678 cw(c26.69,52.678) 26.69,53.948 60.96,53.948 cw(c60.96,52.678) 62.23,52.678 62.23,27.078 cw(c60.96,27.078) 60.96,25.808

## Other copper
Top Layer:
  pour cut-out: 58.3,31.129 60,31.129 60,27.3 58.3,27.3
  pour cut-out: 58.3,27.3 58.3,31.129 60,31.129 60,27.3
  pour cut-out: 58.3,27.3 58.3,31.129 60,31.129 60,27.3
  pour cut-out: 58.555,36.576 61.73,36.576 61.73,53.975 58.555,53.975
  text "1" at 59.574,27.725 h0.8 r90
Mid Layer 1:
  pour cut-out: 58.3,31.129 60,31.129 60,27.3 58.3,27.3
  pour cut-out: 58.555,36.576 61.73,36.576 61.73,53.975 58.555,53.975
  text "2" at 59.574,28.375 h0.8 r90
Mid Layer 2:
  pour cut-out: 58.3,31.129 60,31.129 60,27.3 58.3,27.3
  pour cut-out: 58.555,36.576 61.73,36.576 61.73,53.975 58.555,53.975
  text "3" at 59.574,29.875 h0.8 r90
Bottom Layer:
  pour cut-out: 58.3,31.129 60,31.129 60,27.3 58.3,27.3
  pour cut-out: 58.3,31.129 60,31.129 60,27.3 58.3,27.3
  pour cut-out: 58.3,27.3 58.3,31.129 60,31.129 60,27.3
  pour cut-out: 58.555,36.576 61.73,36.576 61.73,53.975 58.555,53.975
  text "4" at 59.574,30.725 h0.8 r90

## Silkscreen, mask and mechanical layers (free items; w line width, h text height)
Top Overlay:
  drawing of 4 lines, arcs and shapes, not listed
  text "RST" at 51.8,51.8 h0.7
  text "MO" at 32.4,49.3 h0.7
  text "MI" at 35.1,49.3 h0.7
  text "SCK" at 37.3,49.3 h0.7
  text "RST" at 42.3,49.3 h0.7
  text "IO0" at 44.8,49.3 h0.7
  text "CS" at 40,49.2 h0.7
  text "GND" at 27,49 h0.7
  text "3V3" at 29.6,49 h0.7
  text "STM32WB" at 27.1,35.2 h1
  text "expansion" at 27.15,34.117 h0.8
  text "board" at 27.15,32.95 h0.8
  text "Rev 1.0" at 27.113,32.039 h0.6
  text "GND" at 27,30.1 h0.7
  text "DEBUG" at 51.37,30.075 h0.7
  text "SDA" at 32.1,29.7 h0.7
  text "SCL" at 34.9,29.7 h0.7
  text "RX" at 37.5,29.7 h0.7
  text "TX" at 40,29.7 h0.7
  text "IO2" at 42.4,29.7 h0.7
  text "IO1" at 45.1,29.7 h0.7
  text "3V3" at 49.82,27.525 h0.76 r90
  text "TXD" at 52.22,27.525 h0.76 r90
  text "RXD" at 54.42,27.525 h0.76 r90
  text "GND" at 56.92,27.525 h0.76 r90
Mechanical 14:
  lines w0.1: 58.039,53.948 60.45,53.948 cw(c60.45,52.678) 61.72,52.678 61.72,51.8 61.72,27.6 61.72,27.078 cw(c60.45,27.078) 60.45,25.808 60.198,25.808

## Text inside footprints (layer, text, board x,y; h text height)
U1: Mechanical 14 "66" at 51.773,40.968 h0.45 r270; Mechanical 14 "67" at 51.773,40.068 h0.45 r270; Mechanical 14 "68" at 51.773,39.168 h0.45 r270; Mechanical 14 "69" at 51.773,38.268 h0.45 r270; Mechanical 14 "65" at 52.673,40.968 h0.45 r270; Mechanical 14 "80" at 52.673,40.068 h0.45 r270; Mechanical 14 "81" at 52.673,39.168 h0.45 r270; Mechanical 14 "70" at 52.673,38.268 h0.45 r270; Mechanical 14 "64" at 53.573,40.968 h0.45 r270; Mechanical 14 "79" at 53.573,40.068 h0.45 r270; Mechanical 14 "82" at 53.573,39.168 h0.45 r270; Mechanical 14 "71" at 53.573,38.268 h0.45 r270; Mechanical 14 "63" at 54.473,40.968 h0.45 r270; Mechanical 14 "78" at 54.473,40.068 h0.45 r270; Mechanical 14 "83" at 54.473,39.168 h0.45 r270; Mechanical 14 "72" at 54.473,38.268 h0.45 r270; Mechanical 14 "62" at 55.373,40.968 h0.45 r270; Mechanical 14 "77" at 55.373,40.068 h0.45 r270; Mechanical 14 "84" at 55.373,39.168 h0.45 r270; Mechanical 14 "73" at 55.373,38.268 h0.45 r270; Mechanical 14 "74" at 56.273,38.268 h0.45 r270; Mechanical 14 "75" at 56.273,39.168 h0.45 r270; Mechanical 14 "76" at 56.273,40.068 h0.45 r270; Mechanical 14 "61" at 56.273,40.968 h0.45 r270; Mechanical 14 "48" at 57.643,36.953 h0.45 r270; Mechanical 14 "47" at 57.643,36.453 h0.45 r270; Mechanical 14 "46" at 57.168,36.453 h0.45 r270; Mechanical 14 "18" at 50.393,42.328 h0.45 r270; Mechanical 14 "17" at 50.393,42.803 h0.45 r270; Mechanical 14 "16" at 50.868,42.803 h0.45 r270; Mechanical 14 "2" at 57.168,42.703 h0.45 r270; Mechanical 14 "60" at 57.643,42.328 h0.45 r270; Mechanical 14 "1" at 57.643,42.678 h0.45 r270; Mechanical 14 "30" at 50.393,36.953 h0.45 r270; Mechanical 14 "31" at 50.393,36.428 h0.45 r270; Mechanical 14 "32" at 50.868,36.453 h0.45 r270; Mechanical 14 "86" at 60.618,36.578 h0.45 r270; Mechanical 14 "85" at 60.618,42.678 h0.45 r270
U2: Mechanical 14 "1" at 36.371,34.553 h1.5; Mechanical 14 "8" at 45.146,34.578 h1.5; Mechanical 14 "9" at 45.146,44.228 h1.5; Mechanical 14 "16" at 35.946,44.228 h1.5